# EAGLE board box (EAGLE 6.1)
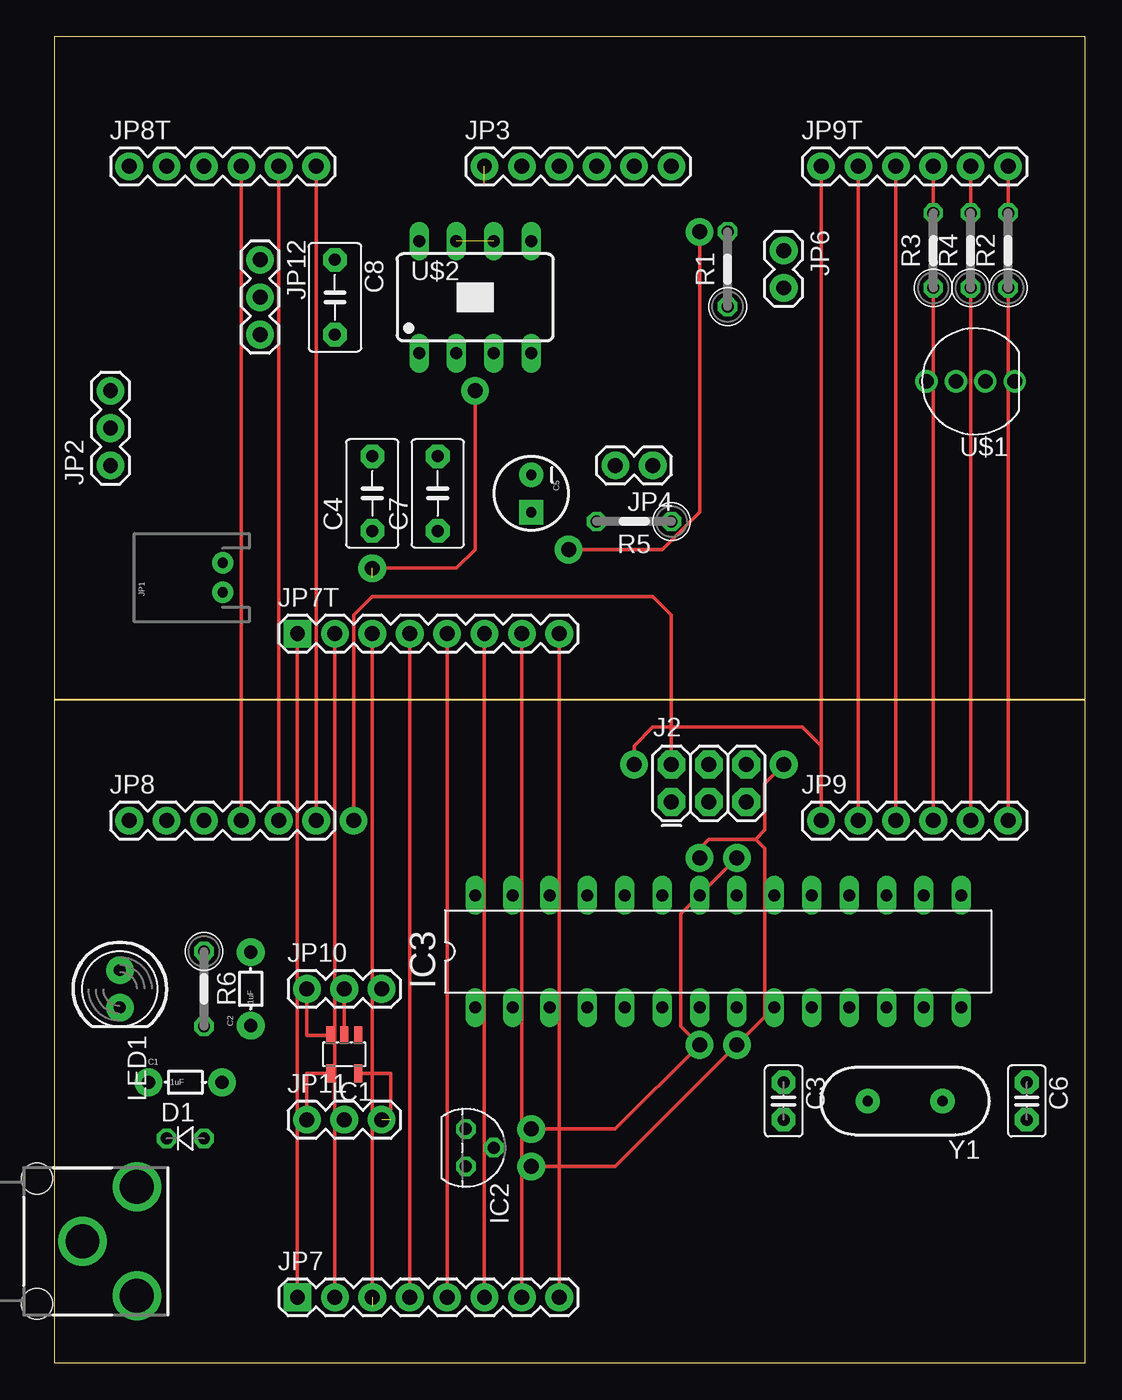
[diagram p0: board, top side]
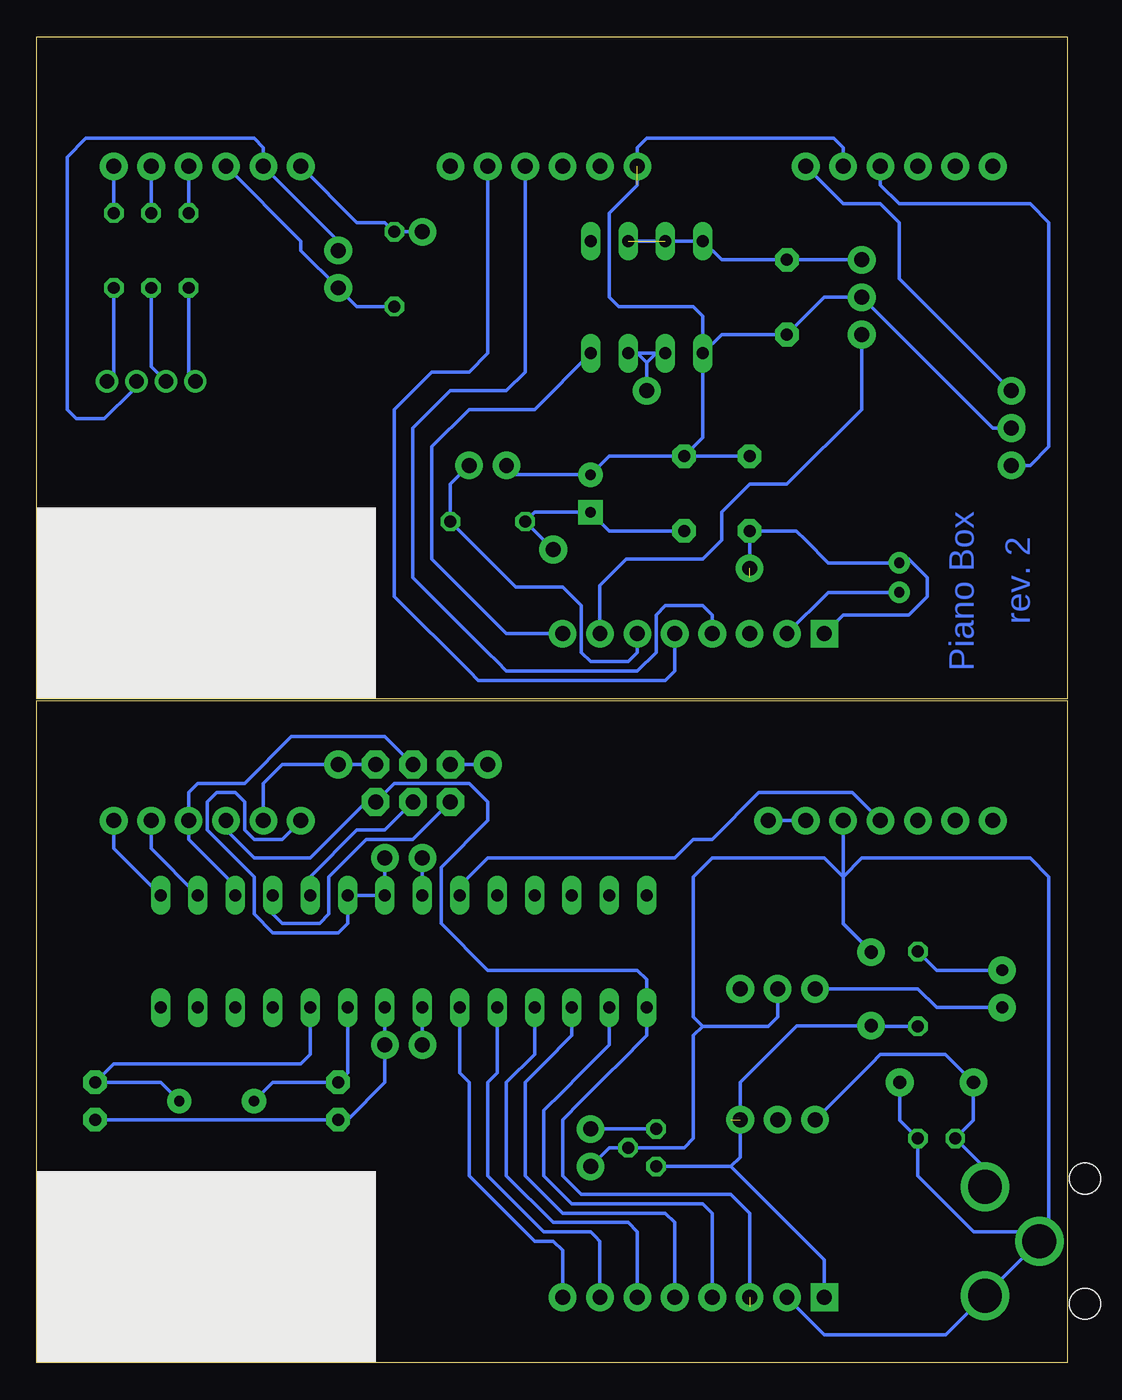
[diagram p1: board, bottom side, seen from below]

Size 70 x 90.08 mm. Coordinates in mm from the lower left corner, seen from the top.
Outline: 0,0 70,0 70,45 0,45 0,0
Outline: 0,45.09 70,45.09 70,90.08 0,90.08 0,45.09
Copper layers (1*16): Top 0.035mm / dielectric 1.5mm / Bottom 0.035mm
Design rules: minimum track width 10mil, minimum drill 24mil, track to track 8mil, track to pad 8mil, pad to pad 8mil, via to via 8mil, smd to smd 8mil, copper to edge 40mil, drill to drill 8mil, minimum pad ring 10mil, minimum via ring 8mil, stop-mask expansion 4mil, vias tented up to drill 0mil, thermal gap 10mil

## Footprints (pad centres in the part's own frame; a part is rotated, then mirrored left to right if it is on the bottom)
AXIAL-5MM = drill 0.9 pad 1.88: P$1 -2.5,0; P$2 2.5,0
C2.5-2 = drill 0.813 pad 1.6 octagon: 1 -1.27,0; 2 1.27,0
C5B3.5 = drill 0.813 pad 1.6 octagon: 1 -2.54,0; 2 2.54,0
CPOL-RADIAL-10UF-25V = drill 0.7 pad 1.651 square: 1 1.27,0 | drill 0.7 pad 1.651: 2 -1.27,0
D-2.5 = drill 0.813 octagon: A 1.27,0; C -1.27,0
SOT23-5L = smd 0.55 x 1.2: 1 -0.95,-1.3; 2 0,-1.3; 3 0.95,-1.3; 4 0.95,1.3; 5 -0.95,1.3
TO92 = drill 0.813 pad 1.27 octagon: 1 -1.27,0; 2 0,1.905; 3 1.27,0
DIL28-3 = drill 0.813 long: 1 -16.51,-3.81; 2 -13.97,-3.81; 3 -11.43,-3.81; 4 -8.89,-3.81; 5 -6.35,-3.81; 6 -3.81,-3.81; 7 -1.27,-3.81; 8 1.27,-3.81; 9 3.81,-3.81; 10 6.35,-3.81; 11 8.89,-3.81; 12 11.43,-3.81; 13 13.97,-3.81; 14 16.51,-3.81; 15 16.51,3.81; 16 13.97,3.81; 17 11.43,3.81; 18 8.89,3.81; 19 6.35,3.81; 20 3.81,3.81; 21 1.27,3.81; 22 -1.27,3.81; 23 -3.81,3.81; 24 -6.35,3.81; 25 -8.89,3.81; 26 -11.43,3.81; 27 -13.97,3.81; 28 -16.51,3.81
RCA = drill 2.3: BARREL 0,0; BREAK 3.7,3.7; SPRING 3.7,-3.7 | hole 2.1: -3.1,4.25; -3.1,-4.25
2X3 = drill 1.016 pad 1.88 octagon: 1 0,0; 2 0,2.54; 3 2.54,0; 4 2.54,2.54; 5 5.08,0; 6 5.08,2.54
JST-2-PTH-NS = drill 0.7 pad 1.448: 1 -1,0; 2 1,0
1X03 = drill 1.016 pad 1.88: 1 0,0; 2 2.54,0; 3 5.08,0
1X06 = drill 1.016 pad 1.88: 1 0,0; 2 2.54,0; 3 5.08,0; 4 7.62,0; 5 10.16,0; 6 12.7,0
1X02 = drill 1.016 pad 1.88: 1 0,0; 2 2.54,0
1X01NS = drill 1.016 pad 1.88: 1 0,0
1X08 = drill 1.016 pad 1.88 square: 1 0,0 | drill 1.016 pad 1.88: 2 2.54,0; 3 5.08,0; 4 7.62,0; 5 10.16,0; 6 12.7,0; 7 15.24,0; 8 17.78,0
LED5MM = drill 0.813 pad 1.88: A -1.27,0; K 1.27,0
0207/5V = drill 0.813 octagon: 1 -2.54,0; 2 2.54,0
LED-TRICOLOR-THROUGHHOLE = drill 1: BLU 3,0; GND -1,0; GRN 1,0; RED -3,0
DIL08-OPTO = drill 0.813 long: 1 -3.81,-3.81; 2 -1.27,-3.81; 3 1.27,-3.81; 4 3.81,-3.81; 5 3.81,3.81; 6 1.27,3.81; 7 -1.27,3.81; 8 -3.81,3.81
HC49US = drill 0.7 pad 1.651: 1 -2.54,0; 2 2.54,0

## Placement (x,y rotation side)
C1  1uF  [AXIAL-5MM]  8.89,19.05 0 top
C2  1uF  [AXIAL-5MM]  13.34,25.4 90 top
C3  22pF  [C2.5-2]  49.53,17.78 270 top
C4  100nF  [C5B3.5]  21.59,59.05 90 top
C5  10uF  [CPOL-RADIAL-10UF-25V]  32.38,59.05 270 top
C6  22pF  [C2.5-2]  66.04,17.78 270 top
C7  100nF  [C5B3.5]  26.04,59.05 90 top
C8  100nF  [C5B3.5]  19.05,72.39 270 top
D1  [D-2.5]  8.89,15.24 0 top
IC1  MAX1555  [SOT23-5L]  19.68,20.95 180 top
IC2  LM2936Z-3.3  [TO92]  27.94,14.61 270 top
IC3  MEGA8-P  [DIL28-3]  45.09,27.94 0 top
J1  POWER_JACKRCA  [RCA]  1.91,8.26 0 top
J2  AVR_SPI_PRG_6PTH  [2X3]  41.91,38.1 0 top
JP1  BATT  [JST-2-PTH-NS]  11.43,53.34 90 top
JP2  MIC  [1X03]  3.81,60.96 90 top
JP3  DEBUG  [1X06]  29.21,81.28 0 top
JP4  LID  [1X02]  40.64,60.96 180 top
JP5  M01SMDNS  [1X01NS]  32.38,15.88 0 top
JP6  RESET  [1X02]  49.53,75.56 270 top
JP7  [1X08]  16.51,4.45 0 top
JP7T  [1X08]  16.51,49.53 0 top
JP8  [1X06]  5.08,36.83 0 top
JP8T  [1X06]  5.08,81.28 0 top
JP9  [1X06]  52.07,36.83 0 top
JP9T  [1X06]  52.07,81.28 0 top
JP10  [1X03]  17.14,25.4 0 top
JP11  [1X03]  17.14,16.51 0 top
JP12  SERVO  [1X03]  13.97,74.93 270 top
JP13  M01SMDNS  [1X01NS]  43.81,21.59 0 top
JP14  M01SMDNS  [1X01NS]  32.38,13.34 0 top
JP15  M01SMDNS  [1X01NS]  46.35,21.59 0 top
JP16  M01SMDNS  [1X01NS]  46.35,34.29 0 top
JP17  M01SMDNS  [1X01NS]  43.81,34.29 0 top
JP18  M01SMDNS  [1X01NS]  21.59,53.98 0 top
JP19  M01SMDNS  [1X01NS]  28.57,66.04 0 top
JP20  M01SMDNS  [1X01NS]  20.32,36.83 0 top
JP21  M01SMDNS  [1X01NS]  34.92,55.24 0 top
JP22  M01SMDNS  [1X01NS]  43.81,76.83 0 top
JP23  M01SMDNS  [1X01NS]  49.53,40.64 0 top
JP25  M01SMDNS  [1X01NS]  39.37,40.64 0 top
LED1  YELLOW  [LED5MM]  4.45,25.4 270 top
R1  10K  [0207/5V]  45.72,74.3 90 top
R2  65  [0207/5V]  64.77,75.56 90 top
R3  5  [0207/5V]  59.69,75.56 90 top
R4  5  [0207/5V]  62.23,75.56 90 top
R5  10K  [0207/5V]  39.37,57.15 180 top
R6  100  [0207/5V]  10.16,25.4 270 top
U$1  LED-TRICOLOR-THROUGHHOLE  [LED-TRICOLOR-THROUGHHOLE]  62.23,66.67 180 top
U$2  TPS2024  [DIL08-OPTO]  28.57,72.39 0 top
Y1  16Mhz  [HC49US]  57.78,17.78 180 top

## Library data of the parts
C1 C2 C5 J1 J2 JP1-JP7 JP7T JP8 JP8T JP9 JP9T JP10-JP23 JP25 LED1 U$1 Y1 = SparkFun
C3 C4 C6-C8 = capacitor-wima
D1 = diode
IC1 = maxim; MF: MAXIM; MPN: MAX1555EZK+T; OC_FARNELL: 1628222; OC_NEWARK: 59J2761
IC2 = national-semiconductor; MF: NATIONAL SEMICONDUCTOR; MPN: LM2936Z-3.3/NOPB; OC_FARNELL: 1564641; OC_NEWARK: 41K4532
IC3 = atmel; OC_FARNELL: unknown; OC_NEWARK: unknown
R1-R6 = resistor
U$2 = texas-extra

## Nets
3.3V: C5.1 C7.1 IC2.1 IC3.7 IC3.20 IC3.21 J2.2 JP2.3 JP5.1 JP8.6 JP8T.6 JP9.1 JP9T.1 JP13.1 JP16.1 JP20.1 JP21.1 JP22.1 JP25.1 R1.2 R5.2
AUD: IC3.23 JP2.1 JP8.4 JP8T.4
BLU-OUT: R3.1 U$1.BLU
CHG_OUT: IC1.3 JP10.1 LED1.K
DC_IN: C1.P$1 D1.C IC1.4 J1.BREAK JP11.1
GND: C1.P$2 C2.P$2 C3.2 C4.2 C5.2 C6.2 C7.2 C8.2 D1.A IC1.2 IC2.2 IC3.8 IC3.22 J1.BARREL J1.SPRING J2.6 JP1.1 JP2.2 JP3.1 JP4.2 JP6.1 JP7.2 JP7T.2 JP8.5 JP8T.5 JP9.2 JP9T.2 JP10.2 JP12.2 JP14.1 JP15.1 JP17.1 JP23.1 U$1.GND U$2.1
GREEN: IC3.16 JP9.5 JP9T.5 R4.2
GRN-OUT: R4.1 U$1.GRN
LID: IC3.4 JP4.1 JP7.6 JP7T.6 R5.1
MISO: IC3.18 J2.1
MOSI: IC3.17 J2.4 JP9.4 JP9T.4 R3.2
N$1: LED1.A R6.1
RED: IC3.15 JP9.6 JP9T.6 R2.2
RED-OUT: R2.1 U$1.RED
RESET: IC3.1 J2.5 JP6.2 JP7.3 JP7T.3 JP9.3 JP9T.3 R1.1
RXD: IC3.3 JP3.5 JP7.5 JP7T.5
SCK: IC3.19 J2.3
SERVO: IC3.5 JP7.7 JP7T.7 JP12.3
SERVO_PWR: IC3.6 JP7.8 JP7T.8 U$2.4
SERVO_VCC: C8.1 JP12.1 U$2.6 U$2.7 U$2.8
TXD: IC3.2 JP3.4 JP7.4 JP7T.4
VCC: C2.P$1 C4.1 IC1.5 IC2.3 JP1.2 JP7.1 JP7T.1 JP11.3 JP18.1 JP19.1 R6.2 U$2.2 U$2.3
XTAL9: C3.1 IC3.9 Y1.2
XTAL19: C6.1 IC3.10 Y1.1

## Tracks (layer width: path | path; a pad name or v marks a point on that pad's centre or on a via)
3.3V
  Top 0.254: JP8T.6 JP8.6 | JP9T.1 JP9.1 52.07,41.91 50.8,43.18 45.72,43.18 40.64,43.18 39.37,41.91 JP25.1 | JP5.1 38.1,15.88 JP13.1 42.55,22.86 42.55,30.48 JP16.1 | JP20.1 20.32,50.8 21.59,52.07 35.56,52.07 40.64,52.07 41.91,50.8 J2.2 | JP21.1 41.27,55.24 43.81,57.78 JP22.1
  Bottom 0.254: IC2.1 31.11,15.88 JP5.1 | IC3.7 JP13.1 | JP16.1 IC3.21 48.26,31.75 IC3.20 48.9,29.84 49.53,29.21 53.98,29.21 55.24,30.48 55.24,33.02 58.42,36.2 58.42,38.1 57.78,38.73 56.52,38.73 55.88,38.1 55.88,36.2 55.24,35.56 53.34,35.56 JP9.1 | JP9T.1 48.26,77.47 46.35,77.47 R1.2 JP22.1 | C7.1 31.11,56.52 C5.1 36.2,57.78 R5.2 JP21.1 | JP2.3 11.43,73.66 11.43,77.47 12.7,78.74 15.24,78.74 JP8T.6 | JP8.6 JP20.1 | JP25.1 J2.2
AUD
  Top 0.254: JP8T.4 JP8.4
  Bottom 0.254: JP8.4 14.61,38.73 20.95,38.73 24.13,35.56 25.4,35.56 26.67,34.29 39.37,34.29 41.27,32.38 IC3.23 | JP2.1 2.54,60.96 1.27,62.23 1.27,77.47 2.54,78.74 11.43,78.74 12.7,80.01 JP8T.4
BLU-OUT
  Bottom 0.254: R3.1 59.69,67.14 U$1.BLU
CHG_OUT
  Top 0.254: IC1.3 17.14,22.25 JP10.1
  Bottom 0.254: LED1.K 8.89,24.13 10.16,25.4 14.61,25.4 JP10.1
DC_IN
  Top 0.254: IC1.4 17.14,19.66 JP11.1
  Bottom 0.254: J1.BREAK 5.61,13.22 D1.C 6.39,16.47 C1.P$1 8.29,20.95 12.7,20.95 13.34,20.32 JP11.1
GND  (1 unrouted)
  Top 0.254: JP8.5 JP8T.5 | JP7.2 JP7T.2 | JP9T.2 JP9.2 | JP14.1 38.1,13.34 JP15.1 48.26,23.5 48.26,34.92 47.62,35.56 | JP17.1 43.81,34.92 44.45,35.56 47.62,35.56 | 47.62,35.56 48.26,36.2 48.26,39.37 JP23.1 | IC1.2 JP10.2
  Bottom 0.254: C6.2 C3.2 48.9,16.51 46.35,19.05 JP15.1 IC3.8 | JP14.1 31.11,14.61 IC2.2 26.04,14.61 25.4,15.24 25.4,22.23 24.77,22.86 | JP7.2 16.51,1.91 8.26,1.91 J1.SPRING J1.BARREL 1.91,8.89 | 19.68,23.5 JP10.2 19.68,23.5 | 19.68,23.5 20.32,22.86 | 20.32,22.86 24.13,22.86 24.77,22.86 | C1.P$2 11.39,16.47 D1.A 10.16,12.7 6.35,8.89 1.91,8.89 | JP8.5 15.24,33.02 | 15.24,33.02 15.24,30.48 15.24,29.84 | 15.24,29.84 15.24,29.8 C2.P$2 13.34,27.94 15.24,29.84 | 15.24,29.84 15.24,33.02 | 15.24,33.02 13.97,34.29 2.54,34.29 1.27,33.02 1.27,8.89 1.91,8.89 | 19.68,23.5 20.32,22.86 | 20.32,22.86 24.77,22.86 | 24.77,22.86 25.4,23.5 25.4,33.02 24.13,34.29 16.51,34.29 15.24,33.02 | JP17.1 IC3.22 | JP6.1 49.53,76.2 JP9T.2 54.61,82.55 55.24,83.19 66.67,83.19 67.94,81.92 67.94,64.77 67.31,64.14 65.41,64.14 63.5,66.04 63.5,66.41 U$1.GND | JP1.1 16.24,52.34 JP7T.2 | C4.2 C7.2 | U$2.1 24.77,64.77 24.77,62.87 C7.2 | JP4.2 37.47,60.33 C5.2 31.11,61.59 C7.2 | U$2.1 23.5,69.85 C8.2 16.51,72.39 JP12.2 5.08,63.5 JP2.2 | 15.24,82.55 JP8T.5 15.24,82.55 | 15.24,82.55 15.88,83.19 28.57,83.19 29.21,82.55 29.21,80.01 30.48,78.74 31.11,78.11 31.11,73.66 31.11,73.03 31.11,72.39 30.48,71.75 26.04,71.75 25.4,71.75 24.77,71.12 U$2.1 | JP9.2 54.61,39.37 53.34,40.64 JP23.1 J2.6
GREEN
  Top 0.254: JP9.5 JP9T.5
  Bottom 0.254: JP9.5 62.23,34.92 IC3.16 | JP9T.5 R4.2
GRN-OUT
  Bottom 0.254: R4.1 62.23,67.67 U$1.GRN
LID
  Top 0.254: JP7.6 JP7T.6
  Bottom 0.254: IC3.4 36.2,20.95 38.1,19.05 38.1,12.7 34.92,9.53 29.84,9.53 29.21,8.89 JP7.6 | JP4.1 41.91,59.69 R5.1 37.47,52.7 34.29,52.7 33.02,51.44 33.02,48.26 32.38,47.62 29.84,47.62 29.21,48.26 JP7T.6
MISO
  Bottom 0.254: IC3.18 53.98,30.48 53.34,29.84 51.44,29.84 50.8,29.84 50.16,30.48 50.16,31.11 50.16,33.02 47.62,35.56 44.45,35.56 J2.1
MOSI
  Top 0.254: JP9T.4 JP9.4
  Bottom 0.254: IC3.17 56.52,32.38 59.69,35.56 JP9.4 59.69,38.73 59.05,39.37 55.88,39.37 52.7,42.55 46.35,42.55 J2.4 | JP9T.4 R3.2
N$1
  Bottom 0.254: LED1.A 8.89,26.67 R6.1
RED
  Top 0.254: JP9.6 JP9T.6
  Bottom 0.254: JP9.6 64.77,35.56 64.77,34.92 IC3.15 | JP9T.6 R2.2
RED-OUT
  Bottom 0.254: R2.1 64.77,67.14 U$1.RED
RESET  (1 unrouted)
  Top 0.254: JP9.3 JP9T.3 | JP7T.3 21.59,3.81
  Bottom 0.254: JP7.3 21.59,10.16 22.86,11.43 33.02,11.43 34.29,12.7 34.29,16.51 33.02,17.78 31.11,19.68 30.48,20.32 28.57,22.23 IC3.1 28.57,26.04 29.21,26.67 39.37,26.67 42.55,29.84 42.55,33.02 42.55,33.66 39.37,36.83 39.37,38.1 40.64,39.37 45.72,39.37 J2.5 47.62,38.1 50.16,35.56 50.8,34.92 51.44,34.29 55.24,34.29 57.15,36.2 JP9.3 | R1.1 48.26,71.75 JP6.2 52.07,75.56 52.07,76.2 JP9T.3
RXD
  Top 0.254: JP7T.5 JP7.5
  Bottom 0.254: IC3.3 33.66,22.23 35.56,20.32 36.83,19.05 36.83,12.7 35.56,11.43 34.29,10.16 27.3,10.16 26.67,9.53 JP7.5 | JP3.5 39.37,68.58 40.64,67.31 43.18,67.31 45.72,64.77 45.72,52.07 40.64,46.99 40.01,46.35 29.21,46.35 27.3,46.35 26.67,46.99 JP7T.5
SCK
  Bottom 0.254: J2.3 46.35,36.2 48.26,36.2 51.44,33.02 IC3.19
SERVO
  Top 0.254: JP7T.7 JP7.7
  Bottom 0.254: JP7.7 31.75,8.26 32.07,8.57 | 32.07,8.57 32.38,8.89 | IC3.5 38.73,19.68 39.37,19.05 39.37,12.7 35.56,8.89 32.38,8.89 | 32.38,8.89 32.07,8.57 | JP12.3 13.97,64.77 19.05,59.69 21.59,59.69 23.5,57.78 23.5,55.88 24.77,54.61 26.04,54.61 29.95,54.61 31.75,52.81 JP7T.7
SERVO_PWR
  Top 0.254: JP7.8 JP7T.8
  Bottom 0.254: JP7.8 34.29,7.62 34.92,8.26 35.56,8.26 36.2,8.26 40.64,12.7 40.64,16.51 40.64,19.05 41.27,19.68 IC3.6 | JP7T.8 38.1,49.53 43.18,54.61 43.18,62.23 40.64,64.77 36.2,64.77 U$2.4
SERVO_VCC  (1 unrouted)
  Bottom 0.254: U$2.6 U$2.8 23.5,74.93 C8.1 JP12.1
TXD
  Top 0.254: JP7.4 24.13,48.26 JP7T.4
  Bottom 0.254: IC3.2 31.11,21.59 33.02,19.68 34.29,18.41 35.56,17.14 35.56,12.7 33.66,10.79 24.77,10.79 24.13,10.16 JP7.4 | JP3.4 36.83,67.31 38.1,66.04 40.64,66.04 41.91,66.04 44.45,63.5 44.45,53.34 39.37,48.26 38.73,47.62 38.1,46.99 29.21,46.99 27.94,48.26 27.94,50.8 27.3,51.44 24.77,51.44 24.13,50.8 JP7T.4
VCC  (2 unrouted)
  Top 0.254: JP7T.1 JP7.1 | JP18.1 27.3,53.98 28.57,55.24 JP19.1 | IC1.5 22.86,19.66 22.86,16.51
  Bottom 0.254: 22.86,13.34 22.23,13.97 JP11.3 22.23,19.05 19.68,21.59 18.41,22.86 18.38,22.9 C2.P$1 13.29,22.86 R6.2 | 22.86,13.34 IC2.3 | JP7.1 16.51,6.99 22.86,13.34 | JP7T.1 15.24,50.8 10.79,50.8 9.53,52.07 9.53,53.34 10.79,54.61 11.16,54.61 JP1.2 16.24,54.34 17.78,55.88 18.41,56.52 C4.1 21.59,53.34 | U$2.2 27.94,68.58 | 27.94,68.58 29.21,68.58 | 29.21,68.58 U$2.3 | 28.57,67.94 JP19.1 28.57,67.94 | 28.57,67.94 29.21,68.58 | 28.57,67.94 27.94,68.58
XTAL9
  Bottom 0.254: Y1.2 53.98,19.05 53.34,19.05 C3.1 48.9,19.68 IC3.9
XTAL19
  Bottom 0.254: IC3.10 51.44,20.95 52.07,20.32 64.77,20.32 C6.1 61.59,19.05 Y1.1

## Text on the board
Bottom: rev. 2 | Piano Box